# EAGLE board PCB v20 (EAGLE 9.7.0)
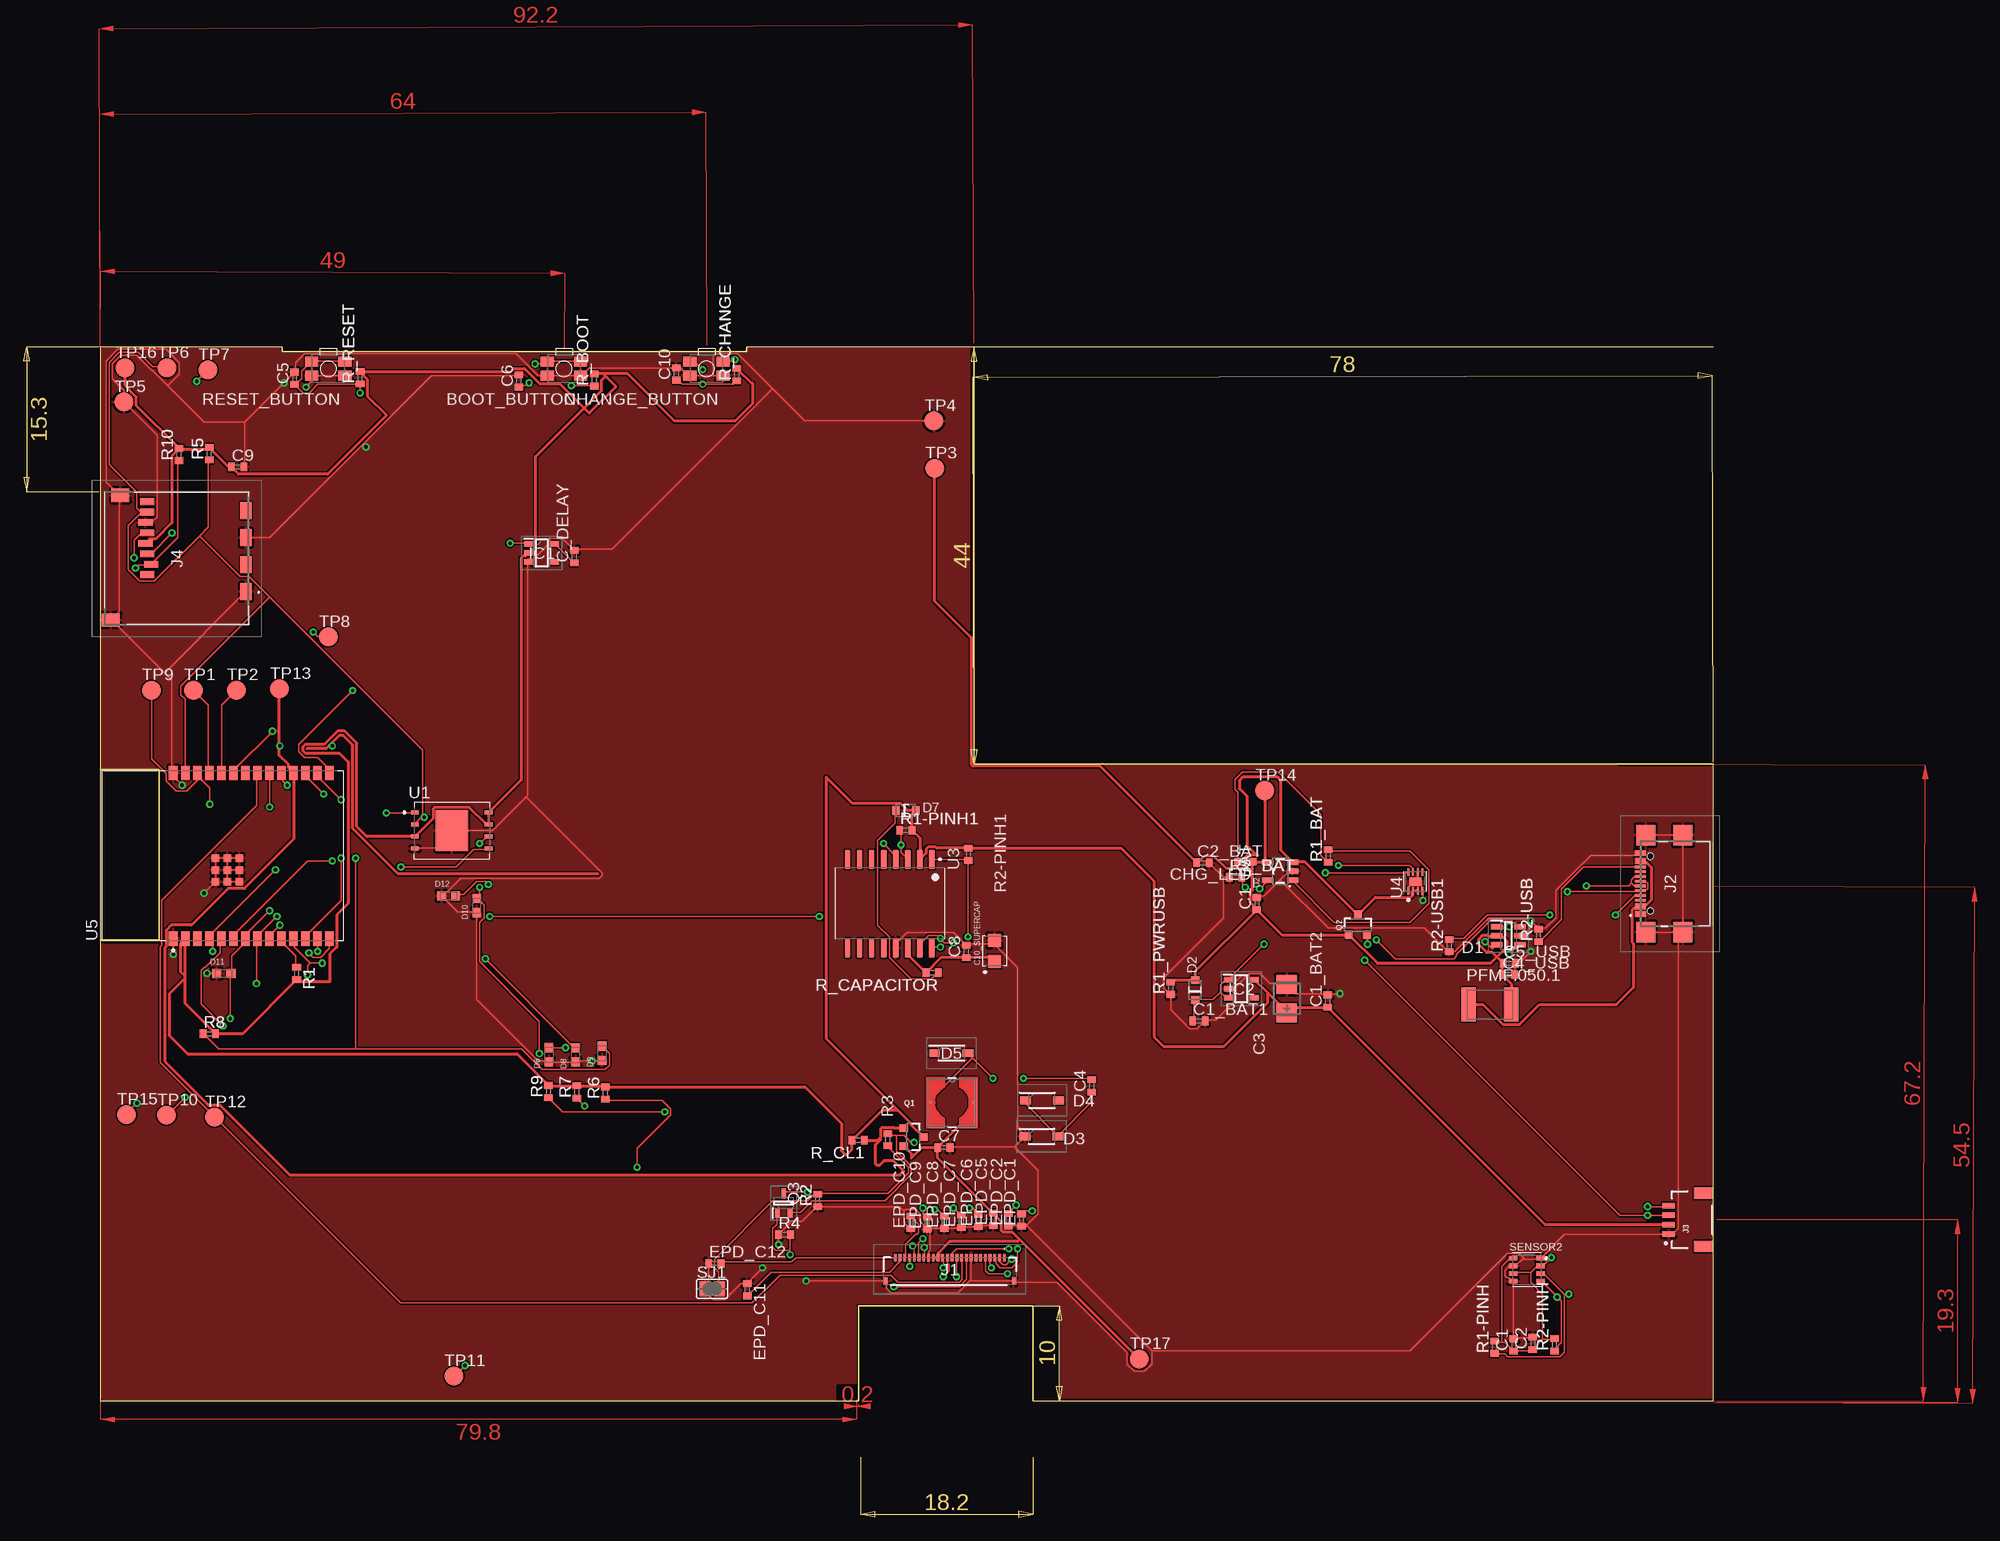
[diagram p0: board, top side]
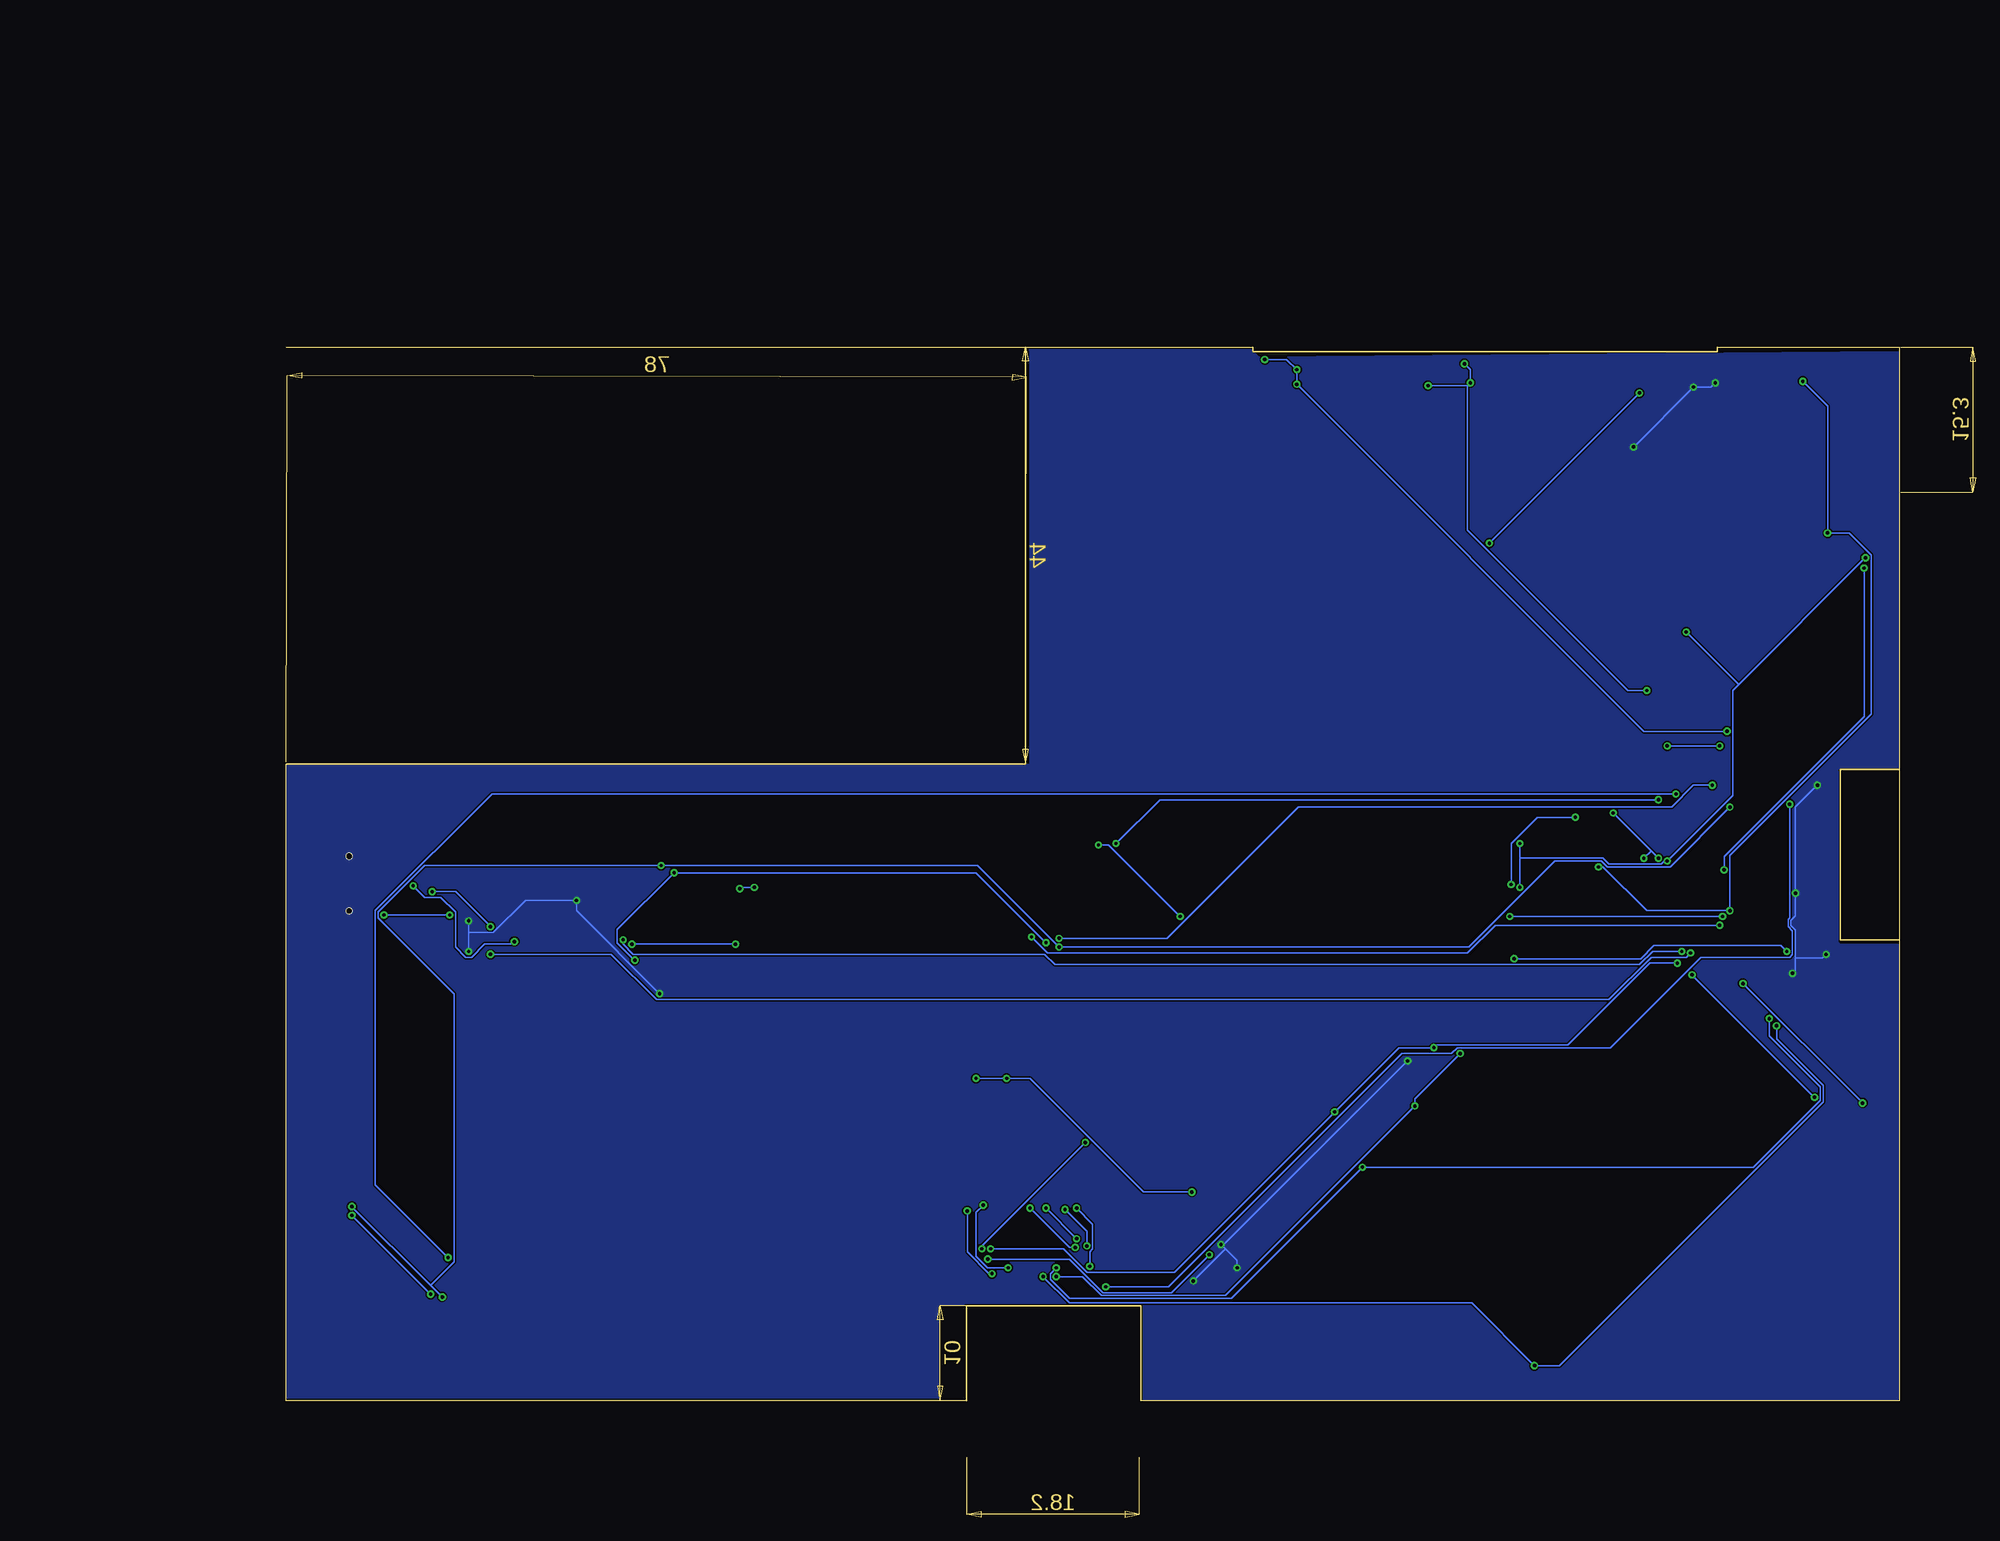
[diagram p1: board, bottom side, seen from below]

Size 178.3 x 123.5 mm. Coordinates in mm from the lower left corner, seen from the top.
Outline: 8.1,78.9 8.1,123.5 27.3,123.5 27.3,123.01 76.3,123.01 76.3,123.5 100.3,123.5 100.3,79.5 178.3,79.5 178.3,12.3 106.5,12.3 106.5,22.3 88.1,22.3 88.1,12.3 8.1,12.3 8.1,60.9
Outline: 8.1,78.9 8.1,60.9
Outline: 8.1,78.9 14.3,78.9 14.3,60.9 8.1,60.9
Copper layers (1*16): Top 0.035mm / dielectric 1.5mm / Bottom 0.035mm
Design rules "Fusion Electronics Design Rules": minimum track width 0.1554mm, minimum drill 0.35mm, track to track 6mil, track to pad 6mil, pad to pad 6mil, via to via 6mil, smd to smd 6mil, copper to edge 0.016mm, drill to drill 6mil, minimum pad ring 10mil, minimum via ring 8mil, stop-mask expansion 4mil, vias tented up to drill 9999mil, thermal gap 10mil

## Footprints (pad centres in the part's own frame; a part is rotated, then mirrored left to right if it is on the bottom)
MYBUTTON = smd 1.4 x 1.05: 1 1.75,0.75; 2 -1.75,0.75; 3 -1.75,-0.75; 4 1.75,-0.75
ESP32_WROVER_EAGLE-LTSPICE_C0402 = smd 0.7 x 0.9: 1 -0.65,0; 2 0.65,0
EAGLE-LTSPICE_C0402 = smd 0.7 x 0.9: 1 -0.65,0; 2 0.65,0
RCL_CT3528 = smd 2 x 2.2: + -1.5,0; - 1.5,0
CAPCP3225X100N = smd 1.4 x 1.4: 1 -1.1,0; 2 1.1,0
ADAFRUIT_CHIP-LED0603 = smd 0.8 x 0.8: A 0,-0.75; C 0,0.75
SOT95P280X145-6N = smd 1.2 x 0.6: 1 -1.25,0.95; 2 -1.25,0; 3 -1.25,-0.95; 4 1.25,-0.95; 5 1.25,0; 6 1.25,0.95
ESP32_WROVER_AVX---SD0805S020S1R0_AVX_SD0805S020S1R0_0 = smd 0.8 x 0.9: 1 -1.05,0; 2 1.05,0
SOD3716X135N = smd 1.15 x 0.8: 1 -1.75,0; 2 1.75,0
DIOC1608X36N = smd 0.97 x 0.94: 1 -0.75,0; 2 0.75,0
SOT95P280X125-5N = smd 0.9 x 0.6: 1 -1.4,0.95; 2 -1.4,0; 3 -1.4,-0.95; 4 1.4,-0.95; 5 1.4,0.95
SOT95P280X120-5N = smd 0.9 x 0.6: 1 -1.4,0.95; 2 -1.4,0; 3 -1.4,-0.95; 4 1.4,-0.95; 5 1.4,0.95
FH34SRJ24S05SH99 = smd 0.3 x 0.8: 1 5.75,1.45; 2 5.25,1.45; 3 4.75,1.45; 4 4.25,1.45; 5 3.75,1.45; 6 3.25,1.45; 7 2.75,1.45; 8 2.25,1.45; 9 1.75,1.45; 10 1.25,1.45; 11 0.75,1.45; 12 0.25,1.45; 13 -0.25,1.45; 14 -0.75,1.45; 15 -1.25,1.45; 16 -1.75,1.45; 17 -2.25,1.45; 18 -2.75,1.45; 19 -3.25,1.45; 20 -3.75,1.45; 21 -4.25,1.45; 22 -4.75,1.45; 23 -5.25,1.45; 24 -5.75,1.45 | smd 0.4 x 0.8: MP1 6.75,-1.05; MP2 -6.75,-1.05
SAMACSYS_PARTS_USB4110GFA = smd 0.3 x 1.15: A1 -3.35,3.678; A4 -2.55,3.678; A5 -1.25,3.678; A6 -0.25,3.678; A7 0.25,3.678; A8 1.25,3.678; A9 2.55,3.678; A12 3.35,3.678; B1 3.05,3.678; B4 2.25,3.678; B5 1.75,3.678; B6 0.75,3.678; B7 -0.75,3.678; B8 -1.75,3.678; B9 -2.25,3.678; B12 -3.05,3.678 | smd 2.18 x 2: MP1 -5.11,-0.827; MP2 5.11,-0.827; MP3 -5.11,3.103; MP4 5.11,3.103 | hole 0.65: -2.89,2.603; 2.89,2.603
JST04_1MM_RA = smd 0.6 x 1.35: 1 -1.5,0; 2 -0.5,0; 3 0.5,0; 4 1.5,0 | smd 1.2 x 2: NC1 2.8,-3.675; NC2 -2.8,-3.675
112ATAARR03ATTEND = smd 1.8 x 1.2: G1 10.6,10.4; G2 4.9,10.4; S1 7.75,10.4; S2 2.05,10.4 | smd 1.4 x 1.9: G3 13.6,-3.85; G4 0.45,-2.85 | smd 0.7 x 1.5: P1 8.8,0; P2 7.7,0.4; P3 6.6,0; P4 5.5,-0.2; P5 4.4,0; P6 3.3,-0.2; P7 2.2,0; P8 1.1,0
IND_4828-WE-TPC_WRE = smd 0.127 x 0.127: 1 -2.286,0; 2 2.286,0
ESP32C6_VARISTOR_CT/CN1812 = smd 1.5 x 3.6: 1 -2.25,0; 2 2.25,0
ESP32_WROVER_SPARKFUN-DISCRETESEMI_SOT23-3 = smd 0.8 x 0.9: 1 -0.95,-1; 2 0.95,-1; 3 0,1.1
SOT65P210X110-3N = smd 1.05 x 0.5: 1 -1.05,0.65; 2 -1.05,-0.65; 3 1.05,0
ESP32_WROVER_EAGLE-LTSPICE_R0402 = smd 0.7 x 0.9: 1 -0.65,0; 2 0.65,0
ESP32_WROVER_BME680_PSON80P300X300X100-8N = smd 1.016 x 0.5: 1 1.458,1.2; 2 1.458,0.4; 3 1.458,-0.4; 4 1.458,-1.2; 5 -1.458,-1.22; 6 -1.458,-0.4; 7 -1.458,0.4; 8 -1.458,1.2
SJ = smd 1.168 x 1.6: 1 -0.762,0; 2 0.762,0
TP20R = smd 2 x 2: TP 0,0
SON127P600X800X80-9N = smd 0.94 x 0.44: 1 -3.895,1.905; 2 -3.895,0.635; 3 -3.895,-0.635; 4 -3.895,-1.905; 5 3.895,-1.905; 6 3.895,-0.635; 7 3.895,0.635; 8 3.895,1.905 | smd 3.4 x 4.3: 9 0,0
ESP32_WROVER_SPARKFUN-IC-POWER_SOT23-5 = smd 0.55 x 1.2: 1 -0.95,-1.3; 2 0,-1.3; 3 0.95,-1.3; 4 0.95,1.3; 5 -0.95,1.3
SOIC127P1032X265-16N = smd 2.05 x 0.59: 1 -4.655,4.445; 2 -4.655,3.175; 3 -4.655,1.905; 4 -4.655,0.635; 5 -4.655,-0.635; 6 -4.655,-1.905; 7 -4.655,-3.175; 8 -4.655,-4.445; 9 4.655,-4.445; 10 4.655,-3.175; 11 4.655,-1.905; 12 4.655,-0.635; 13 4.655,0.635; 14 4.655,1.905; 15 4.655,3.175; 16 4.655,4.445
SON50P200X200X80-9N = smd 0.76 x 0.27: 1 -0.985,0.75; 2 -0.985,0.25; 3 -0.985,-0.25; 4 -0.985,-0.75; 5 0.985,-0.75; 6 0.985,-0.25; 7 0.985,0.25; 8 0.985,0.75 | smd 0.9 x 1.3: 9 0,0
XCVR_ESP32-C6-WROOM-1-N8 = smd 1.5 x 0.9: 1 -8.75,5.26; 2 -8.75,3.99; 3 -8.75,2.72; 4 -8.75,1.45; 5 -8.75,0.18; 6 -8.75,-1.09; 7 -8.75,-2.36; 8 -8.75,-3.63; 9 -8.75,-4.9; 10 -8.75,-6.17; 11 -8.75,-7.44; 12 -8.75,-8.71; 13 -8.75,-9.98; 14 -8.75,-11.25; 15 8.75,-11.25; 16 8.75,-9.98; 17 8.75,-8.71; 18 8.75,-7.44; 19 8.75,-6.17; 20 8.75,-4.9; 21 8.75,-3.63; 22 8.75,-2.36; 23 8.75,-1.09; 24 8.75,0.18; 25 8.75,1.45; 26 8.75,2.72; 27 8.75,3.99; 28 8.75,5.26 | smd 0.8 x 0.8: 29_1 -2.755,0.79; 29_2 -1.505,0.79; 29_3 -0.255,0.79; 29_4 -2.755,-0.46; 29_5 -1.505,-0.46; 29_6 -0.255,-0.46; 29_7 -2.755,-1.71; 29_8 -1.505,-1.71; 29_9 -0.255,-1.71

## Placement (x,y rotation side)
BOOT_BUTTON  BUTTON_CUSYOMV1  [MYBUTTON]  57.03,121.21 180 top
C1  100nF  [ESP32_WROVER_EAGLE-LTSPICE_C0402]  157.27,18.16 90 top
C1_BAT  4.7uF  [ESP32_WROVER_EAGLE-LTSPICE_C0402]  130.15,64.75 90 top
C1_BAT1  4.7uF  [EAGLE-LTSPICE_C0402]  124.03,52.37 0 top
C1_BAT2  4.7uF  [EAGLE-LTSPICE_C0402]  137.63,54.47 90 top
C2  100nF  [ESP32_WROVER_EAGLE-LTSPICE_C0402]  159.27,18.34 90 top
C2_BAT  4.7uF  [ESP32_WROVER_EAGLE-LTSPICE_C0402]  124.46,69.05 0 top
C3  100uF TANT  [RCL_CT3528]  133.3,54.71 90 top
C4  4.7uF/25V  [ESP32_WROVER_EAGLE-LTSPICE_C0402]  112.71,45.51 90 top
C4_USB  100nF  [ESP32_WROVER_EAGLE-LTSPICE_C0402]  156.69,57.25 0 top
C5  1uF  [ESP32_WROVER_EAGLE-LTSPICE_C0402]  28.59,120.2 90 top
C5_USB  4.7uF  [ESP32_WROVER_EAGLE-LTSPICE_C0402]  156.8,58.45 0 top
C6  100nF  [ESP32_WROVER_EAGLE-LTSPICE_C0402]  52.27,119.92 90 top
C7  10uF  [ESP32_WROVER_EAGLE-LTSPICE_C0402]  97.12,39.01 0 top
C8  100nF  [ESP32_WROVER_EAGLE-LTSPICE_C0402]  99.47,59.7 90 top
C9  100nF  [ESP32_WROVER_EAGLE-LTSPICE_C0402]  22.58,110.83 0 top
C10  100nF  [ESP32_WROVER_EAGLE-LTSPICE_C0402]  68.87,120.66 90 top
C10_SUPERCAP  CPH3225A  [CAPCP3225X100N]  102.46,59.76 90 top
C_DELAY  100nF  [ESP32_WROVER_EAGLE-LTSPICE_C0402]  58.11,101.39 90 top
CHANGE_BUTTON  BUTTON_CUSYOMV1  [MYBUTTON]  72.06,121.21 180 top
CHG_LED  3.3  [ADAFRUIT_CHIP-LED0603]  128.95,69.17 90 top
D1  USBLC6-2SC6Y  [SOT95P280X145-6N]  156.7,61.37 0 top
D2  ESP32_WROVER_AVX---SD0805S020S1R0_AVX_SD0805S020S1R0_0_0AVX_SD0805S020S1R0_0_0  [ESP32_WROVER_AVX---SD0805S020S1R0_AVX_SD0805S020S1R0_0]  123.62,55.64 90 top
D3  MBR0530  [SOD3716X135N]  107.43,40.18 0 top
D4  MBR0530  [SOD3716X135N]  107.47,43.98 0 top
D5  MBR0530  [SOD3716X135N]  97.91,48.98 0 top
D6  PGB1010603MR  [DIOC1608X36N]  55.43,48.8 90 top
D7  ESP32_WROVER_AVX---SD0805S020S1R0_AVX_SD0805S020S1R0_0_0AVX_SD0805S020S1R0_0_0  [ESP32_WROVER_AVX---SD0805S020S1R0_AVX_SD0805S020S1R0_0]  93.09,74.58 0 top
D8  PGB1010603MR  [DIOC1608X36N]  58.23,48.78 90 top
D9  PGB1010603MR  [DIOC1608X36N]  61.03,48.96 90 top
D10  PGB1010603MR  [DIOC1608X36N]  47.83,64.54 90 top
D11  PGB1010603MR  [DIOC1608X36N]  21.12,57.37 0 top
D12  PGB1010603MR  [DIOC1608X36N]  44.85,65.58 0 top
EPD_C1  0.1uF/50V  [ESP32_WROVER_EAGLE-LTSPICE_C0402]  105.31,31.35 90 top
EPD_C2  0.1uF/50V  [ESP32_WROVER_EAGLE-LTSPICE_C0402]  103.91,31.39 90 top
EPD_C5  0.1uF/50V  [ESP32_WROVER_EAGLE-LTSPICE_C0402]  102.31,31.43 90 top
EPD_C6  1uF/50V  [ESP32_WROVER_EAGLE-LTSPICE_C0402]  100.75,31.31 90 top
EPD_C7  1uF/50V  [ESP32_WROVER_EAGLE-LTSPICE_C0402]  98.95,31.22 90 top
EPD_C8  1uF/50V  [ESP32_WROVER_EAGLE-LTSPICE_C0402]  97.15,31.13 90 top
EPD_C9  1uF/50V  [ESP32_WROVER_EAGLE-LTSPICE_C0402]  95.35,31.04 90 top
EPD_C10  1uF/50V  [ESP32_WROVER_EAGLE-LTSPICE_C0402]  93.63,31.11 90 top
EPD_C11  1uF/50V  [ESP32_WROVER_EAGLE-LTSPICE_C0402]  76.37,24.01 270 top
EPD_C12  1uF/50V  [ESP32_WROVER_EAGLE-LTSPICE_C0402]  72.95,26.77 0 top
IC1  BD5229G-TR  [SOT95P280X125-5N]  54.67,101.77 0 top
IC2  XC6220A331MR-G  [SOT95P280X120-5N]  128.51,55.77 0 top
J1  FH34SRJ-24S-0.5SH_99_  [FH34SRJ24S05SH99]  97.74,25.94 0 top
J2  SAMACSYS_PARTS_USB4110-GF-A  [SAMACSYS_PARTS_USB4110GFA]  174.3,66.86 90 top
J3  QWIIC_RIGHT_ANGLE  [JST04_1MM_RA]  173.61,31.38 90 top
J4  112A-TAAR-R03_ATTEND  [112ATAARR03ATTEND]  13.05,108.28 270 top
L1  68uH  [IND_4828-WE-TPC_WRE]  97.97,43.75 0 top
PFMF.050.1  ESP32C6_VARISTORCN1812  [ESP32C6_VARISTOR_CT/CN1812]  154.74,54.1 0 top
Q1  20V/4.2A/52mΩ/1.4W  [ESP32_WROVER_SPARKFUN-DISCRETESEMI_SOT23-3]  93.86,40.11 270 top
Q2  20V/4.2A/52mΩ/1.4W  [ESP32_WROVER_SPARKFUN-DISCRETESEMI_SOT23-3]  140.81,62.46 0 top
Q3  SI1308EDL-T1-GE3  [SOT65P210X110-3N]  80.22,33.14 90 top
R1  10k  [ESP32_WROVER_EAGLE-LTSPICE_R0402]  28.81,57.38 270 top
R1-PINH  10K  [ESP32_WROVER_EAGLE-LTSPICE_R0402]  155.23,17.93 90 top
R1-PINH1  10K  [ESP32_WROVER_EAGLE-LTSPICE_R0402]  93.11,72.49 0 top
R1_BAT  200  [ESP32_WROVER_EAGLE-LTSPICE_R0402]  137.67,69.78 90 top
R1_PWRUSB  100K  [ESP32_WROVER_EAGLE-LTSPICE_R0402]  121.06,55.82 90 top
R2  2.2  [ESP32_WROVER_EAGLE-LTSPICE_R0402]  83.79,33.44 90 top
R2-PINH  10K  [ESP32_WROVER_EAGLE-LTSPICE_R0402]  161.55,18.18 90 top
R2-PINH1  10K  [ESP32_WROVER_EAGLE-LTSPICE_R0402]  99.71,69.95 90 top
R2-USB  5k1  [ESP32_WROVER_EAGLE-LTSPICE_R0402]  159.87,61.4 90 top
R2-USB1  5k1  [ESP32_WROVER_EAGLE-LTSPICE_R0402]  150.43,60.31 90 top
R2_BAT  2K  [ESP32_WROVER_EAGLE-LTSPICE_R0402]  127.89,67.53 0 top
R3  0.47  [ESP32_WROVER_EAGLE-LTSPICE_R0402]  91.19,39.84 90 top
R4  10K  [ESP32_WROVER_EAGLE-LTSPICE_R0402]  80.28,29.81 0 top
R5  10k  [ESP32_WROVER_EAGLE-LTSPICE_R0402]  19.59,112.24 90 top
R6  10k  [ESP32_WROVER_EAGLE-LTSPICE_R0402]  61.39,44.76 90 top
R7  10k  [ESP32_WROVER_EAGLE-LTSPICE_R0402]  58.39,44.88 90 top
R8  10k  [ESP32_WROVER_EAGLE-LTSPICE_R0402]  19.6,51.01 0 top
R9  10k  [ESP32_WROVER_EAGLE-LTSPICE_R0402]  55.39,44.92 90 top
R10  10k  [ESP32_WROVER_EAGLE-LTSPICE_R0402]  16.39,112.16 90 top
R_BOOT  10K  [ESP32_WROVER_EAGLE-LTSPICE_R0402]  60.23,120.02 90 top
R_CAPACITOR  15  [ESP32_WROVER_EAGLE-LTSPICE_R0402]  95.88,57.46 180 top
R_CHANGE  10K  [ESP32_WROVER_EAGLE-LTSPICE_R0402]  75.26,120.59 90 top
R_CL1  10K  [ESP32_WROVER_EAGLE-LTSPICE_R0402]  88.07,39.78 180.6 top
R_RESET  10K  [ESP32_WROVER_EAGLE-LTSPICE_R0402]  35.51,120.27 90 top
RESET_BUTTON  BUTTON_CUSYOMV1  [MYBUTTON]  32.15,121.21 180 top
SENSOR2  ESP32_WROVER_BME680_BME680  [ESP32_WROVER_BME680_PSON80P300X300X100-8N]  158.64,26.12 0 top
SJ1  [SJ]  72.66,24.09 0 top
TP1  TPTP20R  [TP20R]  17.91,87.29 0 top
TP2  TPTP20R  [TP20R]  22.43,87.29 0 top
TP3  TPTP20R  [TP20R]  96.15,110.69 0 top
TP4  TPTP20R  [TP20R]  96.07,115.69 0 top
TP5  TPTP20R  [TP20R]  10.59,117.69 0 top
TP6  TPTP20R  [TP20R]  15.11,121.29 0 top
TP7  TPTP20R  [TP20R]  19.43,121.09 0 top
TP8  TPTP20R  [TP20R]  32.15,92.89 0 top
TP9  TPTP20R  [TP20R]  13.47,87.29 0 top
TP10  TPTP20R  [TP20R]  15.09,42.41 0 top
TP11  TPTP20R  [TP20R]  45.39,14.89 0 top
TP12  TPTP20R  [TP20R]  20.14,42.21 0 top
TP13  TPTP20R  [TP20R]  26.99,87.41 0 top
TP14  TPTP20R  [TP20R]  130.99,76.69 0 top
TP15  TPTP20R  [TP20R]  10.84,42.49 0 top
TP16  TPTP20R  [TP20R]  10.69,121.29 0 top
TP17  TPTP20R  [TP20R]  117.74,16.69 0 top
U1  W25Q512JVEIQ  [SON127P600X800X80-9N]  45.19,72.46 0 top
U2  ESP32_WROVER_SPARKFUN-IC-POWER_MCP73831  [ESP32_WROVER_SPARKFUN-IC-POWER_SOT23-5]  132.61,68.18 90 top
U3  DS3231SN#  [SOIC127P1032X265-16N]  91.4,64.75 270 top
U4  MAX17048G+T10  [SON50P200X200X80-9N]  146.88,67.07 90 top
U5  ESP32-C6-WROOM-1-N8  [XCVR_ESP32-C6-WROOM-1-N8]  21.04,69.8 90 top

## Library data of the parts
BOOT_BUTTON CHANGE_BUTTON CHG_LED PFMF.050.1 RESET_BUTTON SJ1 TP1-TP17 = DeskAssistant v19 v1
C1 C1_BAT C1_BAT1 C1_BAT2 C2 C2_BAT C4 C4_USB C5 C5_USB C6-C10 C_DELAY EPD_C1 EPD_C2 EPD_C5-EPD_C12 = DeskAssistant v19 v1; SPICEMODEL: NONE; SPICEPREFIX: C
C3 = DeskAssistant v19 v1; SPICEPREFIX: C
C10_SUPERCAP = DeskAssistant v19 v1; AVAILABILITY: Not in stock; CHECK_PRICES: https://www.snapeda.com/parts/CPH3225A/Seiko+Instruments/view-part/?ref=eda; DESCRIPTION: 11 mF (EDLC) Supercapacitor 3.3 V 1210 (3225 Metric) - -; MF: Seiko Instruments; MP: CPH3225A; PACKAGE: 1210 Seiko; PRICE: None; PURCHASE-URL: https://www.snapeda.com/api/url_track_click_mouser/?unipart_id=562593&manufacturer=Seiko Instruments&part_name=CPH3225A&search_term=None; SNAPEDA_LINK: https://www.snapeda.com/parts/CPH3225A/Seiko+Instruments/view-part/?ref=snap
D1 = DeskAssistant v19 v1; AVAILABILITY: In Stock; CHECK_PRICES: https://www.snapeda.com/parts/USBLC6-2SC6Y/STMicroelectronics/view-part/?ref=eda; DESCRIPTION: 17V Clamp 5A (8/20µs) Ipp Tvs Diode Surface Mount SOT-23-6; MF: STMicroelectronics; MP: USBLC6-2SC6Y; PACKAGE: SOT-23-6 STMicroelectronics; PRICE: None; SNAPEDA_LINK: https://www.snapeda.com/parts/USBLC6-2SC6Y/STMicroelectronics/view-part/?ref=snap
D2 D7 = DeskAssistant v19 v1; CENTROID_NOT_SPECIFIED: No; DATASHEET: http://datasheets.avx.com/schottky.pdf; DIGIKEY_DESCRIPTION: DIODE SCHOTTKY 20V 1A 0805; DIGIKEY_PART_NUMBER: 478-7800-1-ND; LEAD_FREE: yes; MF: AVX; MOUSER_PART_NUMBER: 581-SD0805S020S1R0; PACKAGE: 0805 (2012 metric); PREFIX: D; ROHS: yes; TEMPERATURE_RANGE_HIGH: +125°C; TEMPERATURE_RANGE_LOW: -55°C
D3-D5 = DeskAssistant v19 v1; AVAILABILITY: In Stock; CHECK_PRICES: https://www.snapeda.com/parts/MBR0530/Onsemi/view-part/?ref=eda; DESCRIPTION: Diode Schottky 30 V 500mA Surface Mount SOD-123; MF: ON Semiconductor; MP: MBR0530; PACKAGE: SOD-123-2 ON Semiconductor; PRICE: None; PURCHASE-URL: https://www.snapeda.com/api/url_track_click_mouser/?unipart_id=179458&manufacturer=ON Semiconductor&part_name=MBR0530&search_term=None; SNAPEDA_LINK: https://www.snapeda.com/parts/MBR0530/Onsemi/view-part/?ref=snap
D6 D8-D12 = DeskAssistant v19 v1; AVAILABILITY: In Stock; CHECK_PRICES: https://www.snapeda.com/parts/PGB1010603MR/Littelfuse/view-part/?ref=eda; DESCRIPTION: 150V (Typ) Clamp - Ipp Tvs Diode Surface Mount 0603 (1608 Metric); MF: Littelfuse Inc.; MP: PGB1010603MR; PACKAGE: 0603 Littelfuse Inc.; PRICE: None; PURCHASE-URL: https://www.snapeda.com/api/url_track_click_mouser/?unipart_id=5659453&manufacturer=Littelfuse Inc.&part_name=PGB1010603MR&search_term=None; SNAPEDA_LINK: https://www.snapeda.com/parts/PGB1010603MR/Littelfuse/view-part/?ref=snap
IC1 = DeskAssistant v19 v1; DESCRIPTION: Voltage Detector with Adjustable Delay Time: CMOS processes are utilized to develop high precision, low current consumption CMOS reset ICs that allow arbitrary setting of the delay time. The extensive lineup includes both Nch Open Drain and CMOS output types in a wide range of detection voltages (from 2.3V to 6.0V, in 0.1V steps), enabling selection of the ideal solution based on customer requirements. In addition, the entire series is of course both lead-free and RoHS-compliant.; HEIGHT: 1.25mm; MANUFACTURER_NAME: ROHM Semiconductor; MANUFACTURER_PART_NUMBER: BD5229G-TR; MOUSER_PART_NUMBER: 755-BD5229G-TR; MOUSER_PRICE-STOCK: https://www.mouser.co.uk/ProductDetail/ROHM-Semiconductor/BD5229G-TR?qs=4kLU8WoGk0vvnhrrYwdszw%3D%3D
IC2 = DeskAssistant v19 v1; DESCRIPTION: LDO Voltage Regulators; HEIGHT: 1.2mm; MANUFACTURER_NAME: Torex; MANUFACTURER_PART_NUMBER: XC6220A331MR-G; MOUSER_PART_NUMBER: 865-XC6220A331MR-G; MOUSER_PRICE-STOCK: https://www.mouser.co.uk/ProductDetail/Torex-Semiconductor/XC6220A331MR-G?qs=AsjdqWjXhJ8ZSWznL1J0gg%3D%3D
J1 = DeskAssistant v19 v1; DESCRIPTION: 24 Position FFC, FPC Connector Contacts, Top and Bottom 0.020" (0.50mm) Surface Mount, Right Angle; HEIGHT: 1.1mm; MANUFACTURER_NAME: Hirose; MANUFACTURER_PART_NUMBER: FH34SRJ-24S-0.5SH(99); MOUSER_PART_NUMBER: 798-FH34SRJ24S05SH99; MOUSER_PRICE-STOCK: https://www.mouser.co.uk/ProductDetail/Hirose-Connector/FH34SRJ-24S-0.5SH99?qs=vcbW%252B4%252BSTIpKBl5ap9J8Fw%3D%3D
J2 = DeskAssistant v19 v1; DESCRIPTION: CONN USB 2.0 TYPE-C R/A SMT; HEIGHT: 3.26mm; MANUFACTURER_NAME: GCT (GLOBAL CONNECTOR TECHNOLOGY); MANUFACTURER_PART_NUMBER: USB4110-GF-A; MOUSER_PART_NUMBER: 640-USB4110-GF-A; MOUSER_PRICE-STOCK: https://www.mouser.co.uk/ProductDetail/GCT/USB4110-GF-A?qs=KUoIvG%2F9IlYiZvIXQjyJeA%3D%3D
J3 = DeskAssistant v19 v1; PROD_ID: CONN-13694
J4 = DeskAssistant v19 v1; DESCRIPTION: Micro SD Card Socket, Push-Push Type, Top Mount, SMT, H=1.83mm, 10u; HEIGHT: 1.9mm; MANUFACTURER_NAME: ATTEND; MANUFACTURER_PART_NUMBER: 112A-TAAR-R03 ATTEND
L1 = DeskAssistant v19 v1; COPYRIGHT: Copyright (C) 2024 Ultra Librarian. All rights reserved.; MANUFACTURER_PART_NUMBER: 744043680; MFR_NAME: Wurth Electronics
Q1 Q2 = DeskAssistant v19 v1; PROD_ID: TRAN-14388
Q3 = DeskAssistant v19 v1; AVAILABILITY: In Stock; CHECK_PRICES: https://www.snapeda.com/parts/SI1308EDL-T1-GE3/Vishay+Siliconix/view-part/?ref=eda; DESCRIPTION: Si1308EDL-T1-GE3 N-channel MOSFET Transistor, 1.5 A, 30 V, 3-Pin SC-70 | Siliconix / Vishay SI1308EDL-T1-GE3; MF: Vishay Siliconix; MP: SI1308EDL-T1-GE3; PACKAGE: SOT-323 Vishay Semiconductor; PRICE: None; PURCHASE-URL: https://www.snapeda.com/api/url_track_click_mouser/?unipart_id=274603&manufacturer=Vishay Siliconix&part_name=SI1308EDL-T1-GE3&search_term=None; SNAPEDA_LINK: https://www.snapeda.com/parts/SI1308EDL-T1-GE3/Vishay+Siliconix/view-part/?ref=snap
R1 R1-PINH R1-PINH1 R1_BAT R1_PWRUSB R2 R2-PINH R2-PINH1 R2-USB R2-USB1 R2_BAT R3-R10 R_BOOT R_CAPACITOR R_CHANGE R_CL1 R_RESET = DeskAssistant v19 v1; SPICEMODEL: NONE; SPICEPREFIX: R
SENSOR2 = DeskAssistant v19 v1; AVAILABILITY: Unavailable; DESCRIPTION: Integrated Environmental Unit; MF: Bosch Sensortec; MP: BME680; PACKAGE: LGA-8 Bosch Tools; PRICE: None
U1 = DeskAssistant v19 v1; AVAILABILITY: In Stock; CHECK_PRICES: https://www.snapeda.com/parts/W25Q512JVEIQ/Winbond+Electronics/view-part/?ref=eda; DESCRIPTION: FLASH - NOR Memory IC 512Mb (64M x 8) SPI - Quad I/O 133 MHz 8-WSON (8x6); MF: Winbond Electronics; MP: W25Q512JVEIQ; PACKAGE: Package; PRICE: None; SNAPEDA_LINK: https://www.snapeda.com/parts/W25Q512JVEIQ/Winbond+Electronics/view-part/?ref=snap
U2 = DeskAssistant v19 v1; PROD_ID: IC-09995
U3 = DeskAssistant v19 v1; AVAILABILITY: In Stock; CHECK_PRICES: https://www.snapeda.com/parts/DS3231SN%23/Analog+Devices/view-part/?ref=eda; DESCRIPTION: Extremely Accurate I²C-Integrated RTC/TCXO/Crystal; MF: Analog Devices; MP: DS3231SN#; PACKAGE: SOIC-16 Maxim; PRICE: None; PURCHASE-URL: https://www.snapeda.com/api/url_track_click_mouser/?unipart_id=99048&manufacturer=Analog Devices&part_name=DS3231SN#&search_term=None; SNAPEDA_LINK: https://www.snapeda.com/parts/DS3231SN%23/Analog+Devices/view-part/?ref=snap
U4 = DeskAssistant v19 v1; AVAILABILITY: In Stock; CHECK_PRICES: https://www.snapeda.com/parts/MAX17048G+T10/Analog+Devices/view-part/?ref=eda; DESCRIPTION: 3µA 1-Cell/2-Cell Fuel Gauge with ModelGauge; MF: Analog Devices; MP: MAX17048G+T10; PACKAGE: TDFN-8 Maxim; PRICE: None; PURCHASE-URL: https://www.snapeda.com/api/url_track_click_mouser/?unipart_id=329239&manufacturer=Analog Devices&part_name=MAX17048G+T10&search_term=None; SNAPEDA_LINK: https://www.snapeda.com/parts/MAX17048G+T10/Analog+Devices/view-part/?ref=snap
U5 = DeskAssistant v19 v1; AVAILABILITY: In Stock; CHECK_PRICES: https://www.snapeda.com/parts/ESP32-C6-WROOM-1-N8/Espressif+Systems/view-part/?ref=eda; DESCRIPTION: Multiprotocol Modules ESP32-C6 module, Wi-Fi 6 in 2.4 GHz band, Bluetooth 5, Zigbee 3.0 and Thread. ESP34-WROOM Compatible - ENGINEERING SAMPLE; MF: Espressif Systems; MP: ESP32-C6-WROOM-1-N8; PACKAGE: None; PRICE: None; SNAPEDA_LINK: https://www.snapeda.com/parts/ESP32-C6-WROOM-1-N8/Espressif+Systems/view-part/?ref=snap

## Nets
3V3: C1_BAT2.1 C3.+ C9.1 D7.2 IC1.2 IC2.5 J3.2 J4.P4 Q1.3 R1-PINH1.2 R1.2 R2-PINH1.2 R5.2 R6.2 R7.2 R8.2 R9.2 R10.2 R_BOOT.2 R_CHANGE.2 R_CL1.2 R_RESET.2 TP16.TP U1.3 U1.7 U1.8 U3.2 U5.2
32KHZ: R2-PINH1.1 U3.1 U5.9
DN: D1.1 J2.A7 J2.B7
DP: D1.3 J2.A6 J2.B6
EPD_3V3: C7.1 EPD_C5.2 J1.15 J1.16 L1.2 Q1.2 TP17.TP
EPD_3V3_C: Q1.1 R_CL1.1 TP13.TP U5.18
EPD_BUSY: J1.9 TP9.TP U5.26
EPD_CS: D6.2 J1.12 R9.1 TP10.TP U5.11
EPD_DC: J1.11 TP11.TP U5.5
EPD_RST: J1.10 TP12.TP U5.21
FLASH_CS: D9.2 R8.1 U1.1 U5.12
GDR: J1.2 Q3.1 R4.2
GND: BOOT_BUTTON.1 BOOT_BUTTON.2 C1.2 C1_BAT1.2 C1_BAT2.2 C1_BAT.2 C2.2 C2_BAT.2 C3.- C4_USB.2 C5.2 C5_USB.2 C6.2 C7.2 C8.2 C9.2 C10.2 C10_SUPERCAP.2 C_DELAY.2 CHANGE_BUTTON.1 CHANGE_BUTTON.2 D1.5 D3.1 D6.1 D8.1 D9.1 D10.1 D11.1 D12.1 EPD_C1.1 EPD_C2.1 EPD_C5.1 EPD_C6.1 EPD_C7.1 EPD_C8.1 EPD_C9.1 EPD_C10.1 EPD_C11.1 EPD_C12.1 IC1.3 IC2.2 J1.8 J1.17 J1.MP1 J1.MP2 J2.A1 J2.A12 J2.B1 J2.B12 J2.MP1 J2.MP2 J2.MP3 J2.MP4 J3.1 J4.G1 J4.G2 J4.G3 J4.G4 J4.P6 R1_PWRUSB.1 R2-USB1.1 R2-USB.2 R2.1 R2_BAT.1 R4.1 RESET_BUTTON.1 RESET_BUTTON.2 SENSOR2.1 SENSOR2.5 SENSOR2.7 SJ1.1 TP4.TP TP5.TP U1.4 U1.9 U2.2 U3.13 U4.1 U4.4 U4.6 U4.9 U5.1 U5.28 U5.29_1 U5.29_2 U5.29_3 U5.29_4 U5.29_5 U5.29_6 U5.29_7 U5.29_8 U5.29_9
GPIO8: R1.1 U5.10
I2C_PW: C1.1 C2.1 R1-PINH.2 R2-PINH.2 SENSOR2.2 SENSOR2.6 SENSOR2.8 U5.17
INT_RTC: R1-PINH1.1 TP15.TP U3.3 U5.8
IO/BOOT: BOOT_BUTTON.3 BOOT_BUTTON.4 C6.1 R_BOOT.1 U5.15
IO/CHANGE: C10.1 CHANGE_BUTTON.3 CHANGE_BUTTON.4 R_CHANGE.1 U5.23
MISO: D12.2 J4.P7 R5.1 TP6.TP U1.2 U5.27
MOSI: D11.2 J1.14 J4.P3 R6.1 TP7.TP U1.5 U5.7
N$1: J2.B5 R2-USB.1
N$2: D7.1 R_CAPACITOR.1
N$3: J2.A5 R2-USB1.2
N$4: EPD_C11.2 J1.23
N$5: EPD_C10.2 J1.22
N$6: EPD_C9.2 J1.21
N$7: C4.1 D3.2 D4.1
N$8: EPD_C8.2 J1.20
N$9: EPD_C7.2 J1.19
N$10: EPD_C6.2 J1.18
N$11: C_DELAY.1 IC1.5
N$12: C5.1 IC1.1 R_RESET.1 RESET_BUTTON.3 RESET_BUTTON.4
N$13: R1_BAT.2 U2.1
N$14: CHG_LED.C R1_BAT.1
N$15: C1_BAT1.1 D2.1 IC2.1 IC2.3 Q2.2
N$16: R2_BAT.2 U2.5
N$17: EPD_C1.2 J1.5
N$18: EPD_C2.2 J1.4
N$19: EPD_C12.2 J1.24
PREVGH: D5.1
PREVGL: D4.2
RESE: J1.3 Q3.2 R3.2
RESE': R2.2 R3.1 SJ1.2
RESET: U5.3
RTC_RST: U3.4 U5.16
RX: TP2.TP U5.24
SCK: D10.2 J1.13 J4.P5 R7.1 TP8.TP U1.6 U5.6
SCL: J3.4 R2-PINH.1 SENSOR2.4 U3.16 U4.7 U5.20
SDA: J3.3 R1-PINH.1 SENSOR2.3 U3.15 U4.8 U5.19
SRC: C4.2 D5.2 L1.1 Q3.3
SS_SD: D8.2 J4.P2 R10.1 U5.4
TX: TP1.TP U5.25
USB_D+: D1.4 U5.14
USB_D-: D1.6 U5.13
VBAT: C2_BAT.1 Q2.3 TP3.TP U2.3 U4.2 U4.3
VBUS: C1_BAT.1 C4_USB.1 C5_USB.1 CHG_LED.A D1.2 D2.2 PFMF.050.1.2 Q2.1 R1_PWRUSB.2 TP14.TP U2.4
VRTC: C8.1 C10_SUPERCAP.1 R_CAPACITOR.2 U3.14
VUSB: J2.A4 J2.A9 J2.B4 J2.B9 PFMF.050.1.1

## Tracks (layer width: path | path; a pad name or v marks a point on that pad's centre or on a via)
3V3
  Top 0.3: 61.4,120.4 62.5,119.3 59.7,116.5 56.57,119.63 54.45,119.63 52.86,121.22 51.7,121.22 51.39,120.92 R_RESET.2 35.51,120.85 36.26,120.09 36.26,118.34 38.3,116.3 32.08,110.08 22.68,110.08 C9.1 21.65,110.83 R5.2 19.4,112.7 16.5,112.7 R10.2 | 61.4,120.4 61.13,120.67 | 61.13,120.67 R_BOOT.2 | R10.2 11.89,117.31 11.89,118.23 10.69,119.43 TP16.TP | J4.P4 13.3,103.23 13.93,103.23 15.64,104.94 15.64,111.98 16.39,112.74 R10.2 | 61.4,120.4 60.98,119.98 60.98,118.89 54.02,111.94 54.02,102.3 53.84,102.12 53.62,102.12 IC1.2 52.92,101.42 52.7,101.42 52.52,101.24 52.52,77.8 U1.8 U1.7 48.83,73.09 47.02,74.91 43.37,74.91 43.19,74.73 43.19,73.72 U1.3 36.21,71.83 35.15,72.89 35.15,81.69 33.89,82.95 33.11,82.95 31.71,81.55 29.71,81.55 29.45,81.29 29.45,80.91 29.71,80.65 33.31,80.65 34.25,79.71 34.25,64.78 33.04,63.57 33.04,60.17 32.3,59.43 32.3,56.5 29.04,56.5 R1.2 23.09,51.01 R8.2 17.05,54.21 U5.2 16.53,60.53 16.53,57.61 16.98,57.16 16.98,56.84 15.35,55.22 15.35,50.85 17.3,48.9 52.06,48.9 R9.2 55.43,45.53 R7.2 61.27,45.53 R6.2 82.46,45.41 86.3,41.57 86.3,38.7 86.7,38.3 86.9,38.3 87.42,38.82 R_CL1.2 90.65,43 92.2,43 | 92.2,43 84.7,50.5 84.7,78.1 87.47,75.33 92.56,75.33 93.32,74.58 D7.2 93.76,74.2 R1-PINH1.2 94.57,71.67 U3.2 95.25,70.08 95.25,70.51 95.47,70.73 96.22,70.73 96.35,70.6 R2-PINH1.2 115.83,70.6 119.3,67.13 119.3,50.7 120.3,49.7 126.7,49.7 131.31,54.31 131.31,55.31 | 92.2,43 93.61,41.59 93.61,41.46 Q1.3 94.96,39.98 | 129.71,56.72 IC2.5 131.31,55.31 | 131.31,55.31 133.3,53.33 C3.+ 133.91,53.82 C1_BAT2.1 160.57,30.88 J3.2
  Top 0.3: R_CHANGE.2 76.8,119.7 76.9,119.7 76.9,117.5 75.1,115.7 68.7,115.7 63.73,120.67 61.13,120.67
32KHZ  (via drill 0.35)
  Top 0.155: U3.1 95.98,69.4 99.67,69.4 R2-PINH1.1 99.67,69.24 v99.67,61.24 | v27.03,62.47 25.95,61.39 25.95,61.09 U5.9
  Bottom 0.155: v27.03,62.47 50.73,62.47 53.65,59.55 97.98,59.55 v99.67,61.24
DN  (via drill 0.35)
  Top 0.155: v162.92,66.01 170.46,66.01 J2.B7 170.74,66.23 171.29,66.23 171.42,66.36 171.42,66.86 171.29,66.99 170.74,66.99 J2.A7 | v156.77,62.32 155.54,62.32 D1.1
  Bottom 0.155: v162.92,66.01 160.46,66.01 v156.77,62.32
DP  (via drill 0.35)
  Top 0.155: 169.69,66.94 170,66.63 170.46,66.63 J2.A6 | 169.69,66.94 169.69,67.24 170,67.55 170.46,67.55 J2.B6 | v164.92,66.63 169.39,66.63 169.69,66.94 | D1.3 155,59.97 v154.24,60.74
  Bottom 0.155: v164.92,66.63 163.69,65.4 162,65.4 160.46,63.86 160.46,60.16 159.38,59.09 158.77,59.09 157.38,60.47 154.51,60.47 v154.24,60.74
EPD_3V3
  Top 0.3: J1.16 J1.15 96.54,27.44 96.54,27.91 97.72,29.1 104.9,29.1 105.1,29.3 104.31,30.09 104.3,30.09 | TP17.TP 117.7,16.69 104.3,30.09 | 104.3,30.09 103.33,30.09 103.16,30.27 103.16,31.23 EPD_C5.2 96.47,37.92 C7.1 | C7.1 94.81,39.01 93.7,37.9 93.7,38.32 Q1.2 | C7.1 100.26,42.8 L1.2
EPD_3V3_C  (via drill 0.35)
  Top 0.155: v32.57,81.4 32.39,81.59 | v27.03,81.4 26.99,81.4
  Top 0.3: Q1.1 91.85,41.06 91.77,41.14 90.61,41.14 90.44,40.97 90.44,40.1 | 90.44,40.1 90.44,39.84 89.9,39.3 89.9,37.3 90.1,37.1 90.3,37.1 90.8,37.6 91.8,37.6 92.9,36.5 92.5,36.1 28.09,36.1 20.68,43.51 19.49,43.51 14.9,48.1 14.9,60.1 15.03,60.23 15.03,61.92 15.58,62.48 17.72,62.48 21.58,66.34 23.27,66.34 28.48,71.55 U5.18 27.96,79.07 27.96,79.42 26.99,80.4 26.99,81.4 TP13.TP | 60.61,67.9 39.5,67.9 34.7,72.7 34.7,81.5 33.7,82.5 33.3,82.5 32.39,81.59 31.9,81.1 29.9,81.1 | R_CL1.1 90.12,39.79 90.44,40.1
  Bottom 0.155: v27.03,81.4 v32.57,81.4
EPD_BUSY  (via drill 0.35)
  Top 0.155: v91.82,24.3 98.75,24.3 99.52,25.07 99.52,27.38 J1.9 | v19.64,75.25 19.64,76.94 18.56,78.02 | 18.56,78.02 18.41,78.17 18.41,78.48 U5.26 18.56,78.02 | 18.56,78.02 17.18,76.63 16.1,76.63 15.03,77.71 15.03,78.48 13.49,80.02 13.49,87.25 TP9.TP
  Bottom 0.155: v91.82,24.3 85.2,24.3 60.58,48.93 55.35,48.93 54.73,49.54 38.57,49.54 29.03,59.09 19.64,59.09 19.34,59.39 19.34,61.85 19.82,62.32 19.82,63.08 19.64,63.25 v19.64,75.25
EPD_CS  (via drill 0.35)
  Top 0.155: v103.98,28.31 98.44,28.31 97.98,27.84 97.98,27.54 J1.12 | v67.66,42.77 56.89,42.77 55.5,44.16 R9.1 | v57.19,49.54 55.5,49.54 D6.2 | 30.26,58.47 28.57,60.16 28.57,60.93 U5.11 | v31.49,58.47 30.26,58.47 | v17.03,44.31 15.18,42.46 TP10.TP | v29.95,57.24 29.95,58.16 30.26,58.47
  Bottom 0.155: v103.98,28.31 96.28,28.31 93.82,25.84 84.59,25.84 v67.66,42.77 60.89,49.54 v57.19,49.54 56.89,49.85 43.04,49.85 34.42,58.47 v31.49,58.47 | v29.95,57.24 v17.03,44.31
EPD_DC  (via drill 0.35)
  Top 0.155: v98.44,25.38 98.44,27.38 J1.11 | v46.58,15.99 45.5,14.92 TP11.TP | v21.03,51.85 18.72,54.16 18.72,57.7 19.03,58.01 19.18,58.01 20.72,59.55 20.72,60.93 U5.5
  Bottom 0.155: v98.44,25.38 95.67,22.61 53.19,22.61 v46.58,15.99 43.96,15.99 16.1,43.85 16.1,45.54 21.03,50.47 v21.03,51.85
EPD_RST
  Top 0.155: J1.10 99.05,27.38 99.05,25.07 98.75,24.77 92.28,24.77 91.51,25.54 79.82,25.54 76.89,22.61 39.8,22.61 20.26,42.16 TP12.TP 20.1,42.31 14.41,48 14.41,60.16 14.56,60.32 14.56,65.09 24.57,75.09 24.57,78.48 U5.21
FLASH_CS  (via drill 0.35)
  Top 0.155: v38.26,74.32 41.19,74.32 U1.1 | v33.49,69.55 33.49,65.09 29.8,61.39 29.8,61.09 U5.12 | 35.03,49.39 52.58,49.39 54.73,47.23 61.35,47.23 61.81,47.7 61.81,48.93 61.04,49.7 D9.2 | 35.03,49.39 20.57,49.39 19.03,50.93 R8.1 | 35.03,49.39 v35.03,69.55
  Bottom 0.155: v33.49,69.55 34.26,70.32 | 34.26,70.32 v38.26,74.32 | v35.03,69.55 34.26,70.32
GDR  (via drill 0.35)
  Top 0.155: v104.29,27.23 103.67,26.61 103.36,26.61 103.06,26.92 103.06,27.38 J1.2 | 80.89,28.15 80.89,29.69 R4.2 | 80.89,28.15 v80.89,27.69 | 80.89,28.15 79.36,28.15 79.05,28.46 79.05,30.46 79.51,30.92 79.51,32 Q3.1
  Bottom 0.155: v104.29,27.23 95.67,27.23 92.13,23.69 84.9,23.69 v80.89,27.69
GND  (via drill 0.35)
  Top 0.155: 99.82,24.92 99.98,25.07 99.98,27.38 J1.8 | 99.82,24.92 98.59,23.69 91.51,23.69 91.05,24.15 91.05,24.77 J1.MP2 90.9,24.92 v82.59,24.92 | 99.82,24.92 104.44,24.92 J1.MP1 104.59,24.77 109.06,24.77 116.45,17.38 116.45,16.15 117.21,15.38 118.29,15.38 119.06,16.15 119.06,17.53 | EPD_C12.1 72.28,26.77 72.28,24.46 71.97,24.15 SJ1.1 71.97,24 71.97,23.69 72.74,22.92 73.97,22.92 75.66,24.61 76.28,24.61 EPD_C11.1 76.43,24.77 v77.97,26.3 | EPD_C5.1 102.29,30.77 100.9,30.77 EPD_C6.1 100.75,30.61 99.05,30.61 EPD_C7.1 98.9,30.46 97.21,30.46 EPD_C8.1 97.05,30.46 95.36,30.46 | J1.17 95.52,27.54 95.52,28 95.67,28.15 95.67,30 95.36,30.31 EPD_C9.1 95.36,30.46 | 92.9,32.31 92.9,31.08 93.52,30.46 EPD_C10.1 | 92.9,32.31 93.05,32.46 94.13,32.46 94.59,32 94.59,31.23 95.36,30.46 | 92.9,32.31 92.44,32.77 83.82,32.77 R2.1 83.66,32.77 82.13,31.23 81.05,31.23 79.66,29.85 R4.1 79.66,29.69 v79.66,28.77 | 102.29,60.62 102.44,60.78 C10_SUPERCAP.2 102.29,60.62 | 102.29,60.62 102.13,60.47 99.52,60.47 C8.2 99.36,60.47 98.13,61.7 93.21,61.7 92.13,60.62 92.13,60.16 U3.13 | EPD_C2.1 103.98,30.77 105.21,30.77 EPD_C1.1 105.36,30.77 105.83,30.77 | 104.59,39.08 97.82,39.08 C7.2 | 104.59,39.08 105.67,40.16 D3.1 105.67,40.31 104.9,41.08 104.9,58.01 102.29,60.62 | 105.83,30.77 107.06,32 107.06,36.62 104.59,39.08 | 105.83,30.77 119.06,17.53 | 126.6,67.55 127.22,67.55 R2_BAT.1 | 126.6,67.55 125.22,68.94 C2_BAT.2 | 127.53,55.55 127.22,55.85 IC2.2 127.53,55.55 | 127.53,55.55 127.83,55.24 127.83,54.47 125.83,52.47 124.76,52.47 C1_BAT1.2 124.6,52.31 123.83,51.55 123.06,51.55 121.06,53.55 121.06,55.08 R1_PWRUSB.1 120.91,55.24 120.29,55.85 120.29,56.93 126.6,63.24 126.6,67.55
  Top 0.155: 127.53,55.55 129.37,57.39 130.45,57.39 131.53,56.31 133.22,56.31 C3.- 133.38,56.16 134.3,55.24 137.53,55.24 C1_BAT2.2 137.68,55.24 v138.91,55.24 | C2.2 159.23,18.92 157.38,18.92 C1.2 157.23,18.92 157.23,24.77 SENSOR2.5 157.07,24.92 156.77,25.23 156.61,25.23 156.31,25.54 156.31,26 156.77,26.46 157.07,26.46 SENSOR2.7 157.23,26.61 157.54,26.61 158.15,27.23 158.46,27.23 | 158.46,27.23 160,27.23 SENSOR2.1 160.15,27.38 162.62,29.85 173.54,29.85 J3.1 173.7,30 174.16,30 174.62,30.46 174.62,61.7 | J2.B12 170.62,63.7 170.62,63.55 J2.A1 170.62,63.39 170.62,62.32 171.08,61.86 J2.MP3 171.23,61.7 174.62,61.7 | 174.62,61.7 175.08,61.7 J2.MP1 | J2.MP1 175.08,61.86 175.08,71.86 J2.MP2 175.08,72.01 171.23,72.01 J2.MP4 171.08,71.86 170.62,71.4 170.62,70.32 J2.A12 170.62,70.17 170.62,70.01 J2.B1 170.46,69.86 165.39,69.86 161.69,66.17 161.69,63.24 160.61,62.16 160,62.16 R2-USB.2 159.84,62.16 v159.08,62.93 | 132.6,67.24 133.53,68.17 133.84,68.17 U2.2 | 132.6,67.24 130.91,65.55 130.3,65.55 C1_BAT.2 | U4.1 146.15,66.17 146.15,66.47 146.76,67.09 U4.9 | 147.07,67.24 147.07,68.01 U4.6 | 147.07,67.24 146.92,67.09 U4.9 | 147.07,67.24 147.53,66.78 147.53,66.17 U4.4 147.69,66.01 v147.69,65.09 | 147.07,67.24 U4.9 | C4_USB.2 157.38,57.39 157.38,58.32 C5_USB.2 157.54,58.47 157.84,58.47 v159.08,59.7 | v159.08,62.93 158.77,63.24 154.61,63.24 151.07,59.7 150.46,59.7 R2-USB1.1 150.3,59.7 147.84,62.16 137.68,62.16 132.6,67.24 | 174.62,61.7 J2.MP1 | 119.06,17.53 146.3,17.53 156.61,27.84 157.84,27.84 158.46,27.23 | 35.8,113.26 25.95,103.41 23.49,103.41 J4.G2 | 35.8,113.26 43.04,120.49 52.27,120.49 C6.2
  Top 0.155: J4.P6 12.87,105.1 13.64,105.1 14.1,105.56 14.1,114.18 10.72,117.57 TP5.TP 10.56,117.72 10.56,118.95 9.33,120.18 9.33,121.72 10.25,122.65 11.95,122.65 15.18,119.41 | RESET_BUTTON.2 33.8,120.49 30.42,120.49 RESET_BUTTON.1 30.26,120.34 30.26,119.72 v29.8,119.26 | 23.34,115.57 23.34,110.95 C9.2 | 23.34,115.57 v27.49,119.72 28.57,120.8 C5.2 28.72,120.95 28.72,121.88 29.65,122.8 51.96,122.8 54.27,120.49 55.19,120.49 BOOT_BUTTON.1 55.35,120.49 58.73,120.49 BOOT_BUTTON.2 58.89,120.49 59.66,121.26 68.74,121.26 C10.2 68.89,121.26 69.35,121.26 70.28,120.34 CHANGE_BUTTON.1 70.43,120.49 72.74,120.49 | 15.18,119.41 19.03,115.57 23.34,115.57 | U5.29_6 21.64,69.55 22.72,69.55 U5.29_9 | U5.29_5 21.49,68.17 21.49,67.09 U5.29_4 21.64,67.09 22.72,67.09 U5.29_7 | U5.29_8 22.72,68.32 21.64,68.32 U5.29_5 | U5.29_6 21.49,69.4 21.49,68.32 U5.29_5 | v19.34,57.39 20.26,57.39 D11.1 | v19.03,65.86 20.1,66.94 U5.29_1 20.26,67.09 20.26,68.17 U5.29_2 20.26,68.32 20.26,69.4 U5.29_3 21.49,69.55 U5.29_6 | 14.87,89.1 9.33,94.64 J4.G3 9.33,94.79 10.1,95.56 10.1,107.72 J4.G4 10.1,107.87 8.72,109.26 8.72,122.03 9.95,123.26 15.03,123.26 16.41,121.88 16.41,120.65 15.18,119.41 | 14.87,89.1 15.64,88.33 15.64,78.63 U5.28 15.79,78.48 15.79,78.17 v16.72,77.25 | 14.87,89.1 23.34,97.56 J4.G1 | v36.11,112.95 35.8,113.26 | D9.1 60.89,48.16 v59.96,48.16 58.27,48.16 D8.1 58.12,48 55.5,48 D6.1 55.35,48.16 54.27,48.16 47.81,54.62 47.81,63.7 D10.1 47.81,63.86 45.81,63.86 44.11,65.55 D12.1 44.11,65.7 44.42,65.7 46.11,67.4 60.73,67.4 61.04,67.7 61.04,68.01 53.04,76.02 | U1.4 41.34,70.63 43.5,70.63 45.19,72.32 U1.9 45.34,72.47 49.5,72.47 53.04,76.02
  Top 0.155: 72.74,120.49 73.66,120.49 CHANGE_BUTTON.2 | 79.05,119.11 75.35,122.8 73.05,122.8 72.74,122.49 72.74,120.49 | 79.05,119.11 82.43,115.72 95.98,115.72 TP4.TP | 79.05,119.11 62.12,102.18 58.12,102.18 C_DELAY.2 57.96,102.18 56.89,103.25 55.5,103.25 55.35,103.1 55.35,102.64 53.65,100.95 53.35,100.95 IC1.3 53.19,100.79 53.19,76.17 53.04,76.02 | U5.1 15.78,59.39 v15.79,59.39 | v159.08,62.93 159.08,62.22 158.22,61.37 D1.5
  Bottom 0.155: v77.97,26.3 77.97,27.07 79.2,28.31 | 79.51,28.61 79.2,28.31 | 79.2,28.31 v82.59,24.92 | v159.08,62.93 159.08,61.7 | 159.08,61.7 v159.08,59.7 | 159.08,61.7 156.46,61.7 153.07,65.09 v147.69,65.09 147.69,64.01 v138.91,55.24 | v27.49,119.72 27.95,119.26 v29.8,119.26 v36.11,112.95 | v16.72,77.25 19.03,74.94 v19.03,65.86 19.03,63.43 19.51,62.95 19.51,62.45 19.03,61.97 19.03,58.99 | v59.96,48.16 79.51,28.61 | 79.51,28.61 v79.66,28.77 | 19.03,58.99 19.03,57.69 v19.34,57.39 19.1,57.3 | 19.03,58.99 16.2,58.99 v15.79,59.39
  pour Top: 14.56,60.66 14.34,60.44 14.32,60.42 8.18,60.42 8.18,12.38 87.82,12.38 87.82,22.52 87.84,22.54 87.86,22.56 87.88,22.58 106.72,22.58 106.74,22.56 106.96,22.34 106.98,22.32 106.98,12.58 178.22,12.58 178.22,79.42 100.13,79.42 99.94,79.24 99.92,79.22 99.88,79.22 99.86,79.24 99.84,79.26 99.82,79.28 99.82,123.32 99.84,123.34 99.92,123.42 76.38,123.42 76.38,122.88 76.36,122.86 76.34,122.84 76.32,122.82 27.28,122.82 27.26,122.84 27.04,123.06 27.02,123.08 27.02,123.42 8.18,123.42 8.18,79.13 8.33,78.98 14.52,78.98 14.54,78.96 14.56,78.94 14.58,78.92 14.58,60.68
  pour Bottom: 14.56,60.66 14.34,60.44 14.32,60.42 8.18,60.42 8.18,12.38 87.82,12.38 87.82,22.32 87.84,22.34 88.06,22.56 88.08,22.58 106.72,22.58 106.74,22.56 106.96,22.34 106.98,22.32 106.98,12.58 178.22,12.58 178.22,79.42 99.88,79.42 99.86,79.44 99.84,79.46 99.82,79.48 99.82,123.12 99.84,123.14 99.92,123.22 76.53,123.22 75.77,122.46 75.77,122.46 75.76,122.45 75.75,122.44 75.75,122.44 75.75,122.44 75.73,122.43 75.72,122.43 75.72,122.43 75.72,122.43 75.7,122.43 75.69,122.43 75.69,122.43 8.18,123.02 8.18,78.98 14.52,78.98 14.54,78.96 14.56,78.94 14.58,78.92 14.58,60.68
GPIO8
  Top 0.155: R1.1 28.72,58.16 28.72,59.24 27.34,60.62 27.34,60.93 U5.10
I2C_PW  (via drill 0.35)
  Top 0.155: 156,18.46 156.31,18.46 157.23,17.53 C1.1 157.38,17.53 159.08,17.53 159.23,17.69 C2.1 159.38,17.84 160.31,18.76 | 156,18.46 155.38,18.46 R1-PINH.2 | 160.31,18.76 161.54,18.76 R2-PINH.2 | 156,18.46 156,26.46 156.77,27.23 157.07,27.23 SENSOR2.8 | 159.08,25.84 157.23,25.84 SENSOR2.6 | 159.08,25.84 159.69,26.46 160,26.46 SENSOR2.2 160.15,26.61 160.46,26.61 v161.23,27.38 | v31.65,76.32 29.8,78.17 29.8,78.48 U5.17 | 160.31,18.76 160.31,23.54 159.08,24.77 159.08,25.84
  Bottom 0.155: v31.65,76.32 156.61,76.32 168.93,64.01 168.93,35.08 v161.23,27.38
INT_RTC  (via drill 0.35)
  Top 0.155: R1-PINH1.1 92.59,72.47 v92.59,70.94 92.59,70.17 93.21,69.55 U3.3 | v24.57,56.31 24.57,60.93 U5.8 24.72,61.09 24.72,61.39 v26.72,63.39 | v11.95,43.7 10.87,42.62 TP15.TP | v49.19,63.39 v83.97,63.39
  Bottom 0.155: v11.95,43.7 v24.57,56.31 | v92.59,70.94 91.51,70.94 v83.97,63.39 | v26.72,63.39 v49.19,63.39
IO/BOOT  (via drill 0.35)
  Top 0.155: v53.35,119.72 53.04,119.41 52.42,119.41 C6.1 | v53.96,121.72 55.04,121.72 55.19,121.88 BOOT_BUTTON.4 55.35,122.03 58.73,122.03 BOOT_BUTTON.3 | v57.81,119.41 60.12,119.41 R_BOOT.1 | v34.73,87.25 29.03,81.55 29.03,80.79 29.65,80.17 31.03,80.17 32.26,78.94 32.26,78.63 U5.15
  Bottom 0.155: v53.96,121.72 53.35,121.11 v53.35,119.72 53.65,119.41 | 53.65,119.41 v57.81,119.41 | v34.73,87.25 36.73,87.25 53.65,104.18 53.65,119.41
IO/CHANGE  (via drill 0.35)
  Top 0.155: C10.1 68.89,119.88 69.2,119.88 69.51,119.57 v71.66,119.57 74.89,119.57 75.2,119.88 R_CHANGE.1 | v71.66,121.11 70.89,121.88 70.43,121.88 CHANGE_BUTTON.4 | v75.05,122.19 74.89,122.03 73.81,122.03 CHANGE_BUTTON.3 | v26.26,82.94 22.26,78.94 22.26,78.63 U5.23
  Bottom 0.155: v75.05,122.19 72.74,122.19 v71.66,121.11 v71.66,119.57 35.03,82.94 v26.26,82.94
MISO  (via drill 0.35)
  Top 0.155: 18.56,103.56 13.79,98.79 12.25,98.79 11.02,100.02 11.02,104.64 12.41,106.02 | 18.56,103.56 19.49,104.49 19.49,111.57 R5.1 | 12.41,106.02 13.02,106.02 J4.P7 12.41,106.02 | 42.11,74.01 41.34,73.24 U1.2 | 42.11,74.01 42.11,80.94 25.95,97.1 | 25.95,97.1 23.8,99.25 22.87,99.25 18.56,103.56 | v49.04,66.78 48.73,67.09 47.81,67.09 46.42,65.7 45.65,65.7 D12.2 | 42.11,74.01 v42.27,73.86 | 25.95,97.1 16.56,87.71 16.56,86.79 17.03,86.33 17.03,78.63 U5.27 | 12.41,106.02 11.95,106.49 11.95,108.18 9.02,111.1 9.02,121.88 10.1,122.95 12.1,122.95 13.64,121.41 15.03,121.41 TP6.TP
  Bottom 0.155: v49.04,66.78 49.04,71.09 46.27,73.86 v42.27,73.86
MOSI  (via drill 0.35)
  Top 0.155: v97.05,26.3 97.05,27.38 J1.14 | v64.73,36.92 64.73,38.92 68.27,42.46 68.27,43.08 67.35,44 61.5,44 R6.1 | v15.64,103.87 13.49,101.72 13.18,101.72 J4.P3 | v18.26,119.88 19.34,120.95 TP7.TP | v39.8,68.63 45.65,68.63 47.5,70.47 49.04,70.47 U1.5 | v25.95,64.01 23.49,61.55 23.49,61.09 U5.7 23.34,60.93 23.34,60.62 21.95,59.24 21.95,57.39 D11.2 21.8,57.24 v21.8,52.62
  Bottom 0.155: v97.05,26.3 97.67,25.69 97.67,25.07 95.67,23.07 78.59,23.07 v64.73,36.92 23.49,36.92 16.41,44 16.41,45.39 21.8,50.78 v21.8,52.62 | v18.26,119.88 15.64,117.26 v15.64,103.87 13.33,103.87 11.02,101.56 11.02,84.79 25.95,69.86 v25.95,64.01 34.73,64.01 39.34,68.63 v39.8,68.63
N$1
  Top 0.155: R2-USB.1 160,60.78 162.31,63.09 162.31,66.32 164.62,68.63 170.46,68.63 J2.B5
N$2
  Top 0.155: D7.1 91.98,74.48 91.98,73.24 90.13,71.4 90.13,62.47 91.36,61.24 91.36,59.09 93.67,56.78 95.82,56.78 96.44,57.39 R_CAPACITOR.1
N$3  (via drill 0.35)
  Top 0.155: v161.08,63.55 154.46,63.55 152,61.09 150.46,61.09 R2-USB1.2 | v168,63.55 170,65.55 170.46,65.55 J2.A5
  Bottom 0.155: v168,63.55 v161.08,63.55
N$4
  Top 0.155: J1.23 92.44,27.38 92.44,26.92 91.36,25.84 78.89,25.84 76.43,23.38 EPD_C11.2
N$5
  Top 0.155: J1.22 93.05,27.54 93.05,28.77 94.13,29.85 94.28,29.85 94.44,30 94.44,30.92 93.67,31.69 EPD_C10.2
N$6  (via drill 0.35)
  Top 0.155: v93.52,26.46 93.52,27.38 J1.21 | v94.9,32.62 94.9,32 95.21,31.69 EPD_C9.2
  Bottom 0.155: v93.52,26.46 93.52,28 93.21,28.31 93.21,30.92 v94.9,32.62
N$7
  Top 0.155: C4.1 112.6,44.77 112.6,43.7 109.21,40.31 D3.2 109.06,40.31 105.83,43.54 105.83,43.85 D4.1
N$8  (via drill 0.35)
  Top 0.155: v93.82,28.61 93.98,28.46 93.98,27.54 J1.20 | v96.13,32.46 96.44,32.46 97.05,31.85 EPD_C8.2
  Bottom 0.155: v93.82,28.61 93.82,30.15 v96.13,32.46
N$9  (via drill 0.35)
  Top 0.155: v94.9,29.38 94.44,28.92 94.44,27.54 J1.19 | v98.13,32.62 98.9,31.85 EPD_C7.2
  Bottom 0.155: v98.13,32.62 v94.9,29.38
N$10  (via drill 0.35)
  Top 0.155: v95.05,28.46 95.05,27.54 J1.18 | v99.82,32.62 100.13,32.62 100.75,32 EPD_C6.2
  Bottom 0.155: v95.05,28.46 95.67,28.46 v99.82,32.62
N$11
  Top 0.155: IC1.5 56.12,102.64 57.96,100.79 C_DELAY.1
N$12  (via drill 0.35)
  Top 0.155: 35.49,119.57 31.03,119.57 30.11,118.64 29.49,118.64 28.72,119.41 C5.1 28.72,119.57 29.34,120.18 29.34,120.95 30.26,121.88 RESET_BUTTON.4 30.42,122.03 33.8,122.03 RESET_BUTTON.3 | v51.35,102.79 53.19,102.79 IC1.1 | 35.49,119.57 v35.49,118.64 | 35.49,119.57 R_RESET.1
  Bottom 0.155: v35.49,118.64 v51.35,102.79
N$13
  Top 0.155: R1_BAT.2 137.68,70.32 146.3,70.32 148.3,68.32 148.3,64.78 146.3,62.78 138.3,62.78 133.99,67.09 U2.1
N$14
  Top 0.155: CHG_LED.C 128.14,69.24 128.14,76.48 127.83,76.78 127.83,77.86 128.6,78.63 132.45,78.63 136.91,74.17 136.91,69.86 137.53,69.24 R1_BAT.1
N$15  (via drill 0.35)
  Top 0.155: C1_BAT1.1 123.52,52.47 123.52,54.47 D2.1 123.68,54.62 125.53,54.62 126.29,55.39 | 126.29,55.39 126.76,54.93 127.06,54.93 IC2.3 | 126.29,55.39 126.29,56.16 126.76,56.62 127.06,56.62 IC2.1 127.22,56.78 v130.91,60.47 | v141.84,60.47 141.84,61.39 Q2.2
  Bottom 0.155: v130.91,60.47 v141.84,60.47
N$16  (via drill 0.35)
  Top 0.155: v128.91,66.47 128.6,66.78 128.6,67.4 R2_BAT.2 | v130.45,66.32 131.22,67.09 U2.5
  Bottom 0.155: v128.91,66.47 130.3,66.47 v130.45,66.32
N$17  (via drill 0.35)
  Top 0.155: v103.83,25.69 101.82,25.69 101.52,26 101.52,27.38 J1.5 | v106.44,32.31 105.52,32.31 105.36,32.15 EPD_C1.2
  Bottom 0.155: v103.83,25.69 104.13,25.69 106.44,28 v106.44,32.31
N$18  (via drill 0.35)
  Top 0.155: v102.13,26.3 101.98,26.46 J1.4 | v104.75,32.92 103.98,32.15 EPD_C2.2
  Bottom 0.155: v102.13,26.3 104.29,26.3 105.52,27.54 105.52,32.15 v104.75,32.92
N$19
  Top 0.155: J1.24 91.98,27.38 81.51,27.38 81.05,26.92 73.66,26.92 EPD_C12.2
RESE  (via drill 0.35)
  Top 0.155: v104.9,28.31 104.9,26.92 104.29,26.3 103.06,26.3 102.59,26.77 102.59,27.38 J1.3 | v93.98,39.54 93.67,39.54 92.9,40.31 92.13,40.31 | 92.13,40.31 91.36,40.31 91.21,40.46 R3.2 | 92.13,40.31 92.13,38.62 93.67,37.08 93.67,36.16 90.9,33.38 83.2,33.38 81.97,32.15 80.89,32.15 Q3.2
  Bottom 0.155: v104.9,28.31 104.9,28.61 v93.98,39.54
RESE'
  Top 0.155: R3.1 91.21,39.08 93.36,36.92 93.36,36.31 91.21,34.15 83.82,34.15 R2.2 83.66,34 83.36,34 82.74,33.38 79.05,33.38 72.89,27.23 72.89,26.3 73.35,25.84 73.35,24.15 SJ1.2
RTC_RST  (via drill 0.35)
  Top 0.155: v33.49,75.71 31.03,78.17 31.03,78.48 U5.16 | v90.74,71.09 91.98,69.86 91.98,69.55 U3.4
  Bottom 0.155: v33.49,75.71 86.13,75.71 v90.74,71.09
RX
  Top 0.155: U5.24 20.87,78.63 20.87,85.71 22.41,87.25 TP2.TP
SCK  (via drill 0.35)
  Top 0.155: v97.05,25.38 97.67,26 97.67,26.61 97.52,26.77 97.52,27.38 J1.13 | v59.2,43.39 58.43,44.16 R7.1 | v48.11,71.09 48.73,71.7 49.04,71.7 U1.6 | v48.11,66.47 48.11,65.55 47.96,65.4 D10.2 47.96,65.24 48.58,64.63 48.58,63.24 48.11,62.78 48.11,58.62 54.42,52.31 v54.42,48.93 | v32.57,69.24 29.95,69.24 22.26,61.55 22.26,61.09 U5.6 | v11.64,101.25 11.64,103.1 12.41,103.87 13.02,103.87 J4.P5 | v30.57,93.41 31.03,92.94 32.11,92.94 TP8.TP
  Bottom 0.155: v97.05,25.38 94.28,25.38 92.28,23.38 79.2,23.38 v59.2,43.39 59.2,44.16 v54.42,48.93 | v48.11,66.47 48.11,69.55 | 48.11,69.55 v48.11,71.09 | 48.11,69.55 39.34,69.55 38.73,68.94 33.19,68.94 32.88,69.24 v32.57,69.24 25.65,76.17 25.65,87.25 25.03,87.86 | 25.03,87.86 v11.64,101.25 | 25.03,87.86 v30.57,93.41
SCL  (via drill 0.35)
  Top 0.155: R2-PINH.1 161.69,17.53 161.69,17.84 162.31,18.46 162.31,22.77 v161.85,23.23 160.15,24.92 SENSOR2.4 | v171.39,32.77 173.54,32.77 J3.4 | v138.76,68.78 146.3,68.78 146.61,68.47 146.61,68.17 U4.7 | v96.75,60.16 95.98,60.16 U3.16 | v25.95,74.94 25.95,78.48 U5.20
  Bottom 0.155: v161.85,23.23 163.08,24.46 | 163.08,24.46 v171.39,32.77 | v25.95,74.94 32.26,68.63 38.88,68.63 39.5,69.24 44.42,69.24 53.5,60.16 v96.75,60.16 105.36,68.78 v138.76,68.78 163.69,68.78 168.62,63.86 168.62,63.24 160.61,55.24 160.61,26.92 163.08,24.46
SDA  (via drill 0.35)
  Top 0.155: 162.62,23.54 162.62,17.38 162.15,16.92 156.61,16.92 156.31,17.23 155.38,17.23 R1-PINH.1 | 162.62,23.54 160.46,25.69 160.15,25.69 SENSOR2.3 | 162.62,23.54 v163.08,23.54 | J3.3 173.54,31.85 v171.39,31.85 168.46,31.85 v141.53,58.78 | v137.38,68.01 146.15,68.01 U4.8 | v98.13,60.62 97.21,60.62 v96.75,61.09 96.44,61.39 95.52,61.39 94.59,60.47 94.59,60.16 U3.15 | v27.8,77.25 27.34,77.71 27.34,78.48 U5.19
  Bottom 0.155: v163.08,23.54 v171.39,31.85 | v98.13,60.62 105.52,68.01 v137.38,68.01 143.38,62.01 143.38,60.62 v141.53,58.78 | v27.8,77.25 29.8,77.25 32.11,74.94 71.51,74.94 85.36,61.09 v96.75,61.09
SRC  (via drill 0.35)
  Top 0.155: v105.52,46.31 112.6,46.31 C4.2 | 100.13,48.47 99.67,48.93 D5.2 | 100.13,48.47 v102.29,46.31 | v82.74,34.31 80.28,34.31 Q3.3 | 100.13,48.47 95.67,44 95.67,43.7 L1.1
  Bottom 0.155: v105.52,46.31 v102.29,46.31 99.82,46.31 87.82,34.31 v82.74,34.31
SS_SD  (via drill 0.35)
  Top 0.155: R10.1 16.26,111.41 16.26,103.41 13.49,100.64 J4.P2 13.33,100.48 12.1,100.48 v11.79,100.18 | v48.73,58.93 58.12,49.54 D8.2 | v19.95,59.7 19.95,60.62 19.64,60.93 U5.4 19.64,61.09 19.64,61.39 v26.57,68.32
  Bottom 0.155: v48.73,58.93 35.34,58.93 33.95,60.32 20.57,60.32 v19.95,59.7 | v11.79,100.18 11.79,84.48 26.57,69.7 v26.57,68.32
TX
  Top 0.155: U5.25 19.49,78.63 19.49,85.71 17.95,87.25 TP1.TP
USB_D+  (via drill 0.35)
  Top 0.155: v30.11,59.55 30.57,59.09 31.34,59.09 32.26,60.01 32.26,60.93 U5.14 | D1.4 157.84,60.32 157.67,60.32 v156.77,59.41
  Bottom 0.155: v30.11,59.55 30.57,59.09 34.26,59.09 38.73,54.62 139.22,54.62 144.01,59.41 v156.77,59.41
USB_D-  (via drill 0.35)
  Top 0.155: v142.76,60.93 144.76,58.93 150.92,58.93 151.23,59.24 151.23,59.39 154.77,62.93 157.07,62.93 157.54,62.47 157.84,62.47 D1.6 | v31.03,59.7 31.03,60.93 U5.13
  Bottom 0.155: v142.76,60.93 142.76,60.47 141.69,59.39 98.28,59.39 97.21,58.32 35.49,58.32 34.11,59.7 v31.03,59.7
VBAT
  Top 0.3: U4.3 U4.2 146.57,66.02 146.57,65.6 146.37,65.4 142.65,65.4 Q2.3 135.24,69.13 U2.3 | U2.3 133.83,69.05 | 130.22,69.87 130.1,69.87 | 130.1,69.87 129.18,69.87 128.9,69.6 128.9,68.64 128.72,68.47 126.92,68.47 125.58,69.8 124.63,69.8 123.88,69.05 C2_BAT.1 113.6,79.26 100.2,79.26 100.06,79.4 100.06,92.8 96.15,96.71 TP3.TP | U2.3 132.7,70.34 132.7,77.7 132.3,78.1 128.7,78.1 128.3,77.7 128.3,76.9 129.1,76.1 129.1,70.87 130.1,69.87
VBUS
  Top 0.3: PFMF.050.1.2 156.99,56.3 C4_USB.1 156.04,58.34 C5_USB.1 155.01,59.59 154.42,59.59 153.56,60.46 153.56,61.02 153.96,61.42 154.52,61.42 154.64,61.3 154.9,61.3 154.97,61.37 D1.2 155.97,61.37 156.52,60.82 156.52,60.16 154.77,58.41 142.91,58.41 Q2.1 132.79,61.46 C1_BAT.1 | C1_BAT.1 130.15,64.17 129.4,64.92 129.4,65.88 129.7,66.18 CHG_LED.A 129.77,69.1 131.28,69.1 U2.4 130.99,69.45 TP14.TP | R1_PWRUSB.2 121.28,56.69 D2.2 123.62,57.57 C1_BAT.1
VRTC
  Top 0.3: C10_SUPERCAP.1 102.07,59.05 C8.1 96.82,59.05 R_CAPACITOR.2 93.3,59.39 U3.14
VUSB
  Top 0.3: PFMF.050.1.1 154.01,54.1 156.11,52 157.86,52 159.97,54.1 168.1,54.1 169.9,55.9 169.9,60.53 169.74,60.69 169.74,64.08 169.92,64.26 170.57,64.26 J2.A4 J2.B9 171.27,64.61 171.8,65.14 171.8,68.58 171.32,69.06 170.67,69.06 J2.B4 J2.A9
(copper drawn outside any net)
  shapes: Top area x8